# Altium PCB SAU-G0-EX_MAX31865.PcbDoc
Units mil, origin at the board's own origin, x right, y up, seen from the top; angles counter-clockwise.
Board outline 734.77 x 767.84 mil, 2 copper layers (Top Layer, Bottom Layer), stack 35.802 mil thick; 22 components, 19 nets, 79 pads, 0 vias.
Unrouted connection lines stored in the file: 51.
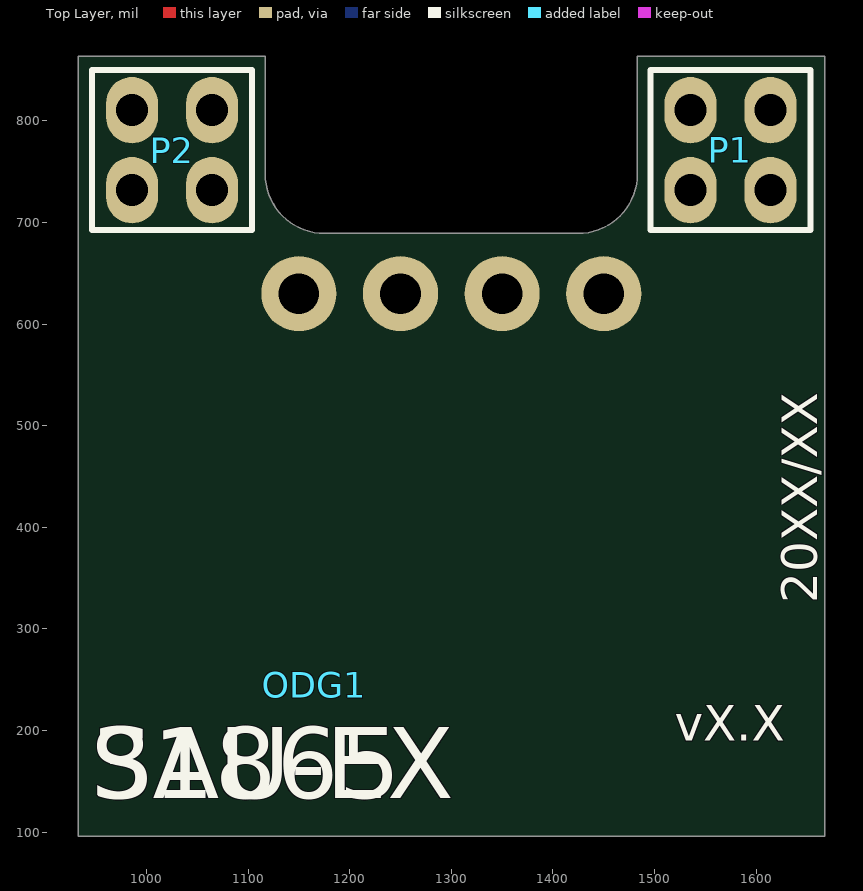
[diagram p0: Top Layer view]
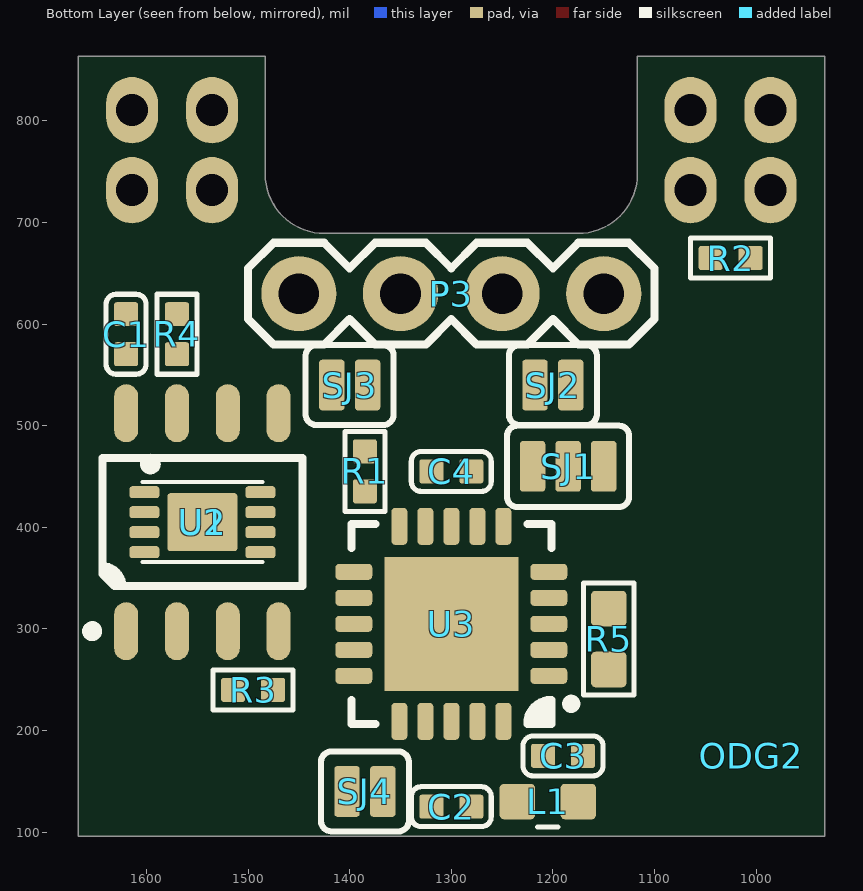
[diagram p1: Bottom Layer view, seen from below]

## Layer stack, top to bottom
Top Solder: solder mask 0.4, Solder Resist, Dk 3.5
Top Layer: signal copper 1.4
Dielectric 2: prepreg 2.8, PP-006, Dk 4.1
Dielectric 1: dielectric 27.4016, FR-4, Dk 4.8
Dielectric 3: prepreg 2.8, PP-006, Dk 4.1
Bottom Layer: signal copper 1.4
Bottom Solder: solder mask 0.4, Solder Resist, Dk 3.5

## Board outline
932.61,96 932.61,863.84 1116.78,863.84 1116.78,747.64 ccw(c1175.21,747.65) 1175.2,689.22 1424.8,689.22 ccw(c1424.79,747.65) 1483.22,747.64 1483.22,863.84 1667.39,863.84 1667.39,96

## Design rules (kind name [scope] priority, off if disabled: settings)
BoardOutlineClearance [All] p1: gap=10 ignorepadtopadclearanceinfootprint=FALSE except(0: Arc-SplitContinuation Track-SplitContinuation SMDPad-SplitContinuation THPad-SplitContinuation Via-SplitContinuation Fill-SplitContinuation Poly-SplitContinuation Region-SplitContinuation Text-SplitContinuation)
Clearance [All] p1: gap=5 ignorepadtopadclearanceinfootprint=FALSE except(0: Arc-Text Arc-Hole Track-Text Track-Hole SMDPad-Text SMDPad-Hole THPad-Text THPad-Hole Via-Text Via-Hole Fill-Text Fill-Hole Poly-Text Poly-Hole Region-Text Region-Hole Text-Text Text-Hole)
MinimumSolderMaskSliver [All] p1: minsoldermaskwidth=0
PlaneClearance [All] p1: clearance=10
PlaneConnect [All] p1: planeconnectstyle=Direct reliefexpansion=10 reliefentries=4 reliefconductorwidth=10 reliefairgap=10
PolygonConnect [All] p1: connectstyle=Direct reliefconductorwidth=10 reliefentries=4 polygonreliefangle="90 Angle" airgapwidth=10
RoutingVias [All] p1: holewidth=11.81 width=19.68 viastyle="Through Hole" minholewidth=11.81 minwidth=19.68 maxholewidth=196.85 maxwidth=196.85
SilkToSilkClearance [All] p1: silktosilkclearance=0
SilkToSolderMaskClearance [IsPad] p1: minsilkscreentomaskgap=0 clearancetoexposedcopper=TRUE
SolderMaskExpansion [All] p1: expansion=2
Width [All] p1: maxlimit=100 minlimit=5 preferedwidth=5
25 further rules are at their usual default settings.

## Components (designator, comment, footprint, x,y, rotation, side; value= is the part's Value field where it differs from the comment)
C1 "100nF" C0402 1620,590 r270 bottom value=0.1u
C2 "100nF" C0402 1300,125 r180 bottom value=0.1u
C3 "100nF" C0402 1190,175 r180 bottom value=0.1u
C4 "100nF" C0402 1300,455 r0 bottom value=0.1u
L1 "10uH" FER0603 1205,130 r0 bottom
ODG1 "ODG_LOGO" ODG_LOGO_soldermask 1165,245 r0 top
ODG2 "ODG_LOGO" ODG_LOGO_soldermask 1005,175 r180 bottom
P1 "Male" 2.0MM_MALE_2X2 1574.79,771.25 r0 top
P2 "Male" 2.0mm_Male_2x2 1025.18,771.25 r0 top
P3 "CONN_X4" 2.54mm_Male_x4 1150,630 r0 bottom
R1 "10K" R0402 1385,455 r270 bottom value=22R
R2 "10K" R0402 1025,665 r180 bottom value=22R
R3 "10K" R0402 1495,240 r180 bottom value=22R
R4 "10K" R0402 1570,590 r90 bottom value=22R
R5 "430R 0.1%" R0603 1145,290 r270 bottom value=22R
SJ1 "SJ_3P" SJ_3P 1185,460 r0 bottom
SJ2 "SJ_2P" SJ_2P 1200,540 r0 bottom
SJ3 "SJ_2P" SJ_2P 1400,540 r0 bottom
SJ4 "SJ_2P" SJ_2P 1385,140 r0 bottom
U1 "M95xx_8P" "ANALOG DEV SOIC-8 R8" 1545,405 r90 bottom
U2 "M95xx_8P_DFN8_1EP" DFN-8-1EP_3x2mm_P0.5mm_EP1.75x1.45mm 1545,405 r180 bottom
U3 "MAX31865" "VQFN-20 5x5MM 0.65" 1300,305 r0 bottom

## Footprints (in the part's own frame and the unit in brackets; to place one, negate y for a bottom-side part, rotate by r counter-clockwise, add the part's x,y. Pads: shape width x height; smd on the part's side, far side on the other; paste and mask are expansions set on the pad)
2.0MM_MALE_2X2 [mm]
  oval 1.3x1.66 hole 0.8: 1(-1,1) 2(1,1) 3(-1,-1) 4(1,-1)
  silkscreen extent -2,-2 2,2, body extent -2,-2 2,2, height 5.7
2.0mm_Male_2x2 [mm]
  oval 1.3x1.66 hole 0.8: 1(-1,1) 2(1,1) 3(-1,-1) 4(1,-1)
  silkscreen extent -2,-2 2,2, body extent -2,-2 2,2, height 5.7
2.54mm_Male_x4 [mil]
  round 74 hole 40: 1(0,0) 2(100,0) 3(200,0) 4(300,0)
  silkscreen extent -50,-50 350,50
"ANALOG DEV SOIC-8 R8" [mm] "SOIC, 8-Leads, Body 4.90x3.90mm, Pitch 1.27mm, IPC Medium Density"
  oval 1.45x0.6 smd: 1(-2.725,1.905) 2(-2.725,0.635) 3(-2.725,-0.635) 4(-2.725,-1.905) 5(2.725,-1.905) 6(2.725,-0.635) 7(2.725,0.635) 8(2.725,1.905)
  silkscreen extent -2.85,-2.5 1.6,2.88, body extent -3.01,-2.45 3.01,2.45, height 1.5
C0402 [mm]
  rrect20% 0.6x0.6 smd: 1(-0.5,0) 2(0.5,0)
  silkscreen extent -1,-0.5 1,0.5, body extent -0.5,-0.26 0.5,0.26, height 0.52
DFN-8-1EP_3x2mm_P0.5mm_EP1.75x1.45mm [mm]
  rrect50% 0.75x0.3 smd: 1(-1.45,0.75) 2(-1.45,0.25) 3(-1.45,-0.25) 4(-1.45,-0.75) 5(1.45,-0.75) 6(1.45,-0.25) 7(1.45,0.25) 8(1.45,0.75)
  rrect10% 1.75x1.45 smd: 9(0,0)
  silkscreen extent -1.55,-1 1.5,1.71, body extent -1.5,-0.99 1.5,0.99, height 0.77
FER0603 [mil]
  rrect25% 35x35 smd: 1(-30,0) 2(30,0)
  silkscreen extent -10,-25 10,25, body extent -31,-16 31,16, height 32
ODG_LOGO_soldermask [mil]
R0402 [mm]
  rrect20% 0.6x0.6 smd: 1(-0.5,0) 2(0.5,0)
  silkscreen extent -1,-0.5 1,0.5, body extent -0.5,-0.25 0.5,0.25, height 0.35
R0603 [mil]
  rrect25% 35x35 smd: 1(-30,0) 2(30,0)
  silkscreen extent -55,-25 55,25, body extent -31,-16 31,16, height 18
SJ_2P [mil]
  rrect25% 25x50 smd: 1(-17.62,0) 2(17.62,0)
  silkscreen extent -43,-39 43,39
SJ_3P [mil]
  rrect25% 25x50 smd: 1(-35,0) 2(0,0) 3(35,0)
  silkscreen extent -60,-40 60,40
"VQFN-20 5x5MM 0.65" [mm] "MCP96XX or MA31865"
  rrect50% 0.925x0.4 smd: 1(-2.437,1.3) 2(-2.437,0.65) 3(-2.437,0) 4(-2.437,-0.65) 5(-2.437,-1.3) 11(2.438,-1.3) 12(2.438,-0.65) 13(2.438,0) 14(2.438,0.65) 15(2.438,1.3)
  rrect50% 0.4x0.925 smd: 6(-1.3,-2.437) 7(-0.65,-2.437) 8(0,-2.437) 9(0.65,-2.437) 10(1.3,-2.437) 16(1.3,2.438) 17(0.65,2.438) 18(0,2.438) 19(-0.65,2.438) 20(-1.3,2.438)
  rect 3.35x3.35 smd paste-5: 21(0,0)
  silkscreen extent -3.1,-2.5 2.5,2.5

## Part data
C1 C2 C3 C4: library part CAP, "Capacitor"
L1: library part inductor_mini, "贴片叠层电感"
P1 P2: library part CONN_2X2
R1 R2 R3 R4 R5: library part RES, "Resistor"
SJ1: "焊接跳线二选一"
SJ2 SJ3 SJ4: "焊接跳线"
U1 U2: "Serial SPI bus EEPROM with high-speed clock"

## Nets (pads, with @x,y where several pads share a name; then routed paths per layer and width w, separated by ;. In a path a pad name is that pad's centre, name@x,y a point inside that pad or via, vN(x,y) a via of type N, cw(c..) or ccw(c..) an arc to the next point about the centre after c; other vN are vias at no path point)
3V3: C1.2 C2.1 L1.2 P2.3 R1.2 R2.2 R3.2 R4.2 U1.8 U2.8 U3.19
GND: C1.1 C2.2 C3.2 P2.1 SJ1.3 U1.4 U2.4 U2.9 U3.10 U3.15 U3.16 U3.21
GPIO_ndef: P2.4 R2.1 SJ4.2 U1.1 U2.1
H\O\L\D\: R4.1 U1.7 U2.7
NetC3_1: C3.1 L1.1 U3.20
NetC4_1: C4.1 P3.2 SJ2.2 U3.7
NetC4_2: C4.2 P3.3 SJ3.1 U3.8
NetP3_1: P3.1 SJ1.1 SJ2.1 U3.5
NetP3_4: P3.4 SJ3.2 U3.9
NetR5_1: R5.1 U3.3 U3.4
NetR5_2: R5.2 U3.1 U3.2
NetSJ1_2: SJ1.2 U3.6
NetSJ4_1: SJ4.1 U3.18
PB6/MISO2: P1.3 U1.2 U2.2 U3.14
SCL1/SCK2: P1.4 U1.6 U2.6 U3.12
SDA1/MOSI2: P1.2 U1.5 U2.5 U3.11
SPI2_NSS: P1.1 R1.1 U3.13
VbatWeek: P2.2
W\: R3.1 U1.3 U2.3
pads on no net: U3.17

## Polygon pours and split planes (outlines as drawn)
GND on Top Layer "vcc-2" (solid, remove dead copper, shelved, pour order 62): 1700,900 900,900 900,50 1700,50
GND on Bottom Layer "vcc-2" (solid, remove dead copper, shelved, pour order 64): 1700,900 900,900 900,50 1700,50

## Silkscreen, mask and mechanical layers (free items; w line width, h text height)
Top Overlay:
  text "20XX/XX" at 1660,325 h35 r90
  text "vX.X" at 1520,190 h35
  text "SAU-EX" at 945,110 h120
  text "31865" at 945,110 h120
Mechanical 1:
  the board outline again, w6
Mechanical 2:
  lines w5.98: 936.61,277.24 936.61,859.84 ; 1113.78,859.84 1113.78,744.09 ccw(c1175.2,744.09) 1175.2,682.68 1424.8,682.68 ccw(c1424.8,744.09) 1486.22,744.09 1486.22,859.84 1663.39,859.84 1663.39,100 1130.38,100
  lines w6: 933.61,479.92 1666.39,479.92 ; 1300,97 1300,862.84